# Allegro board interposer_pcie_sma.brd
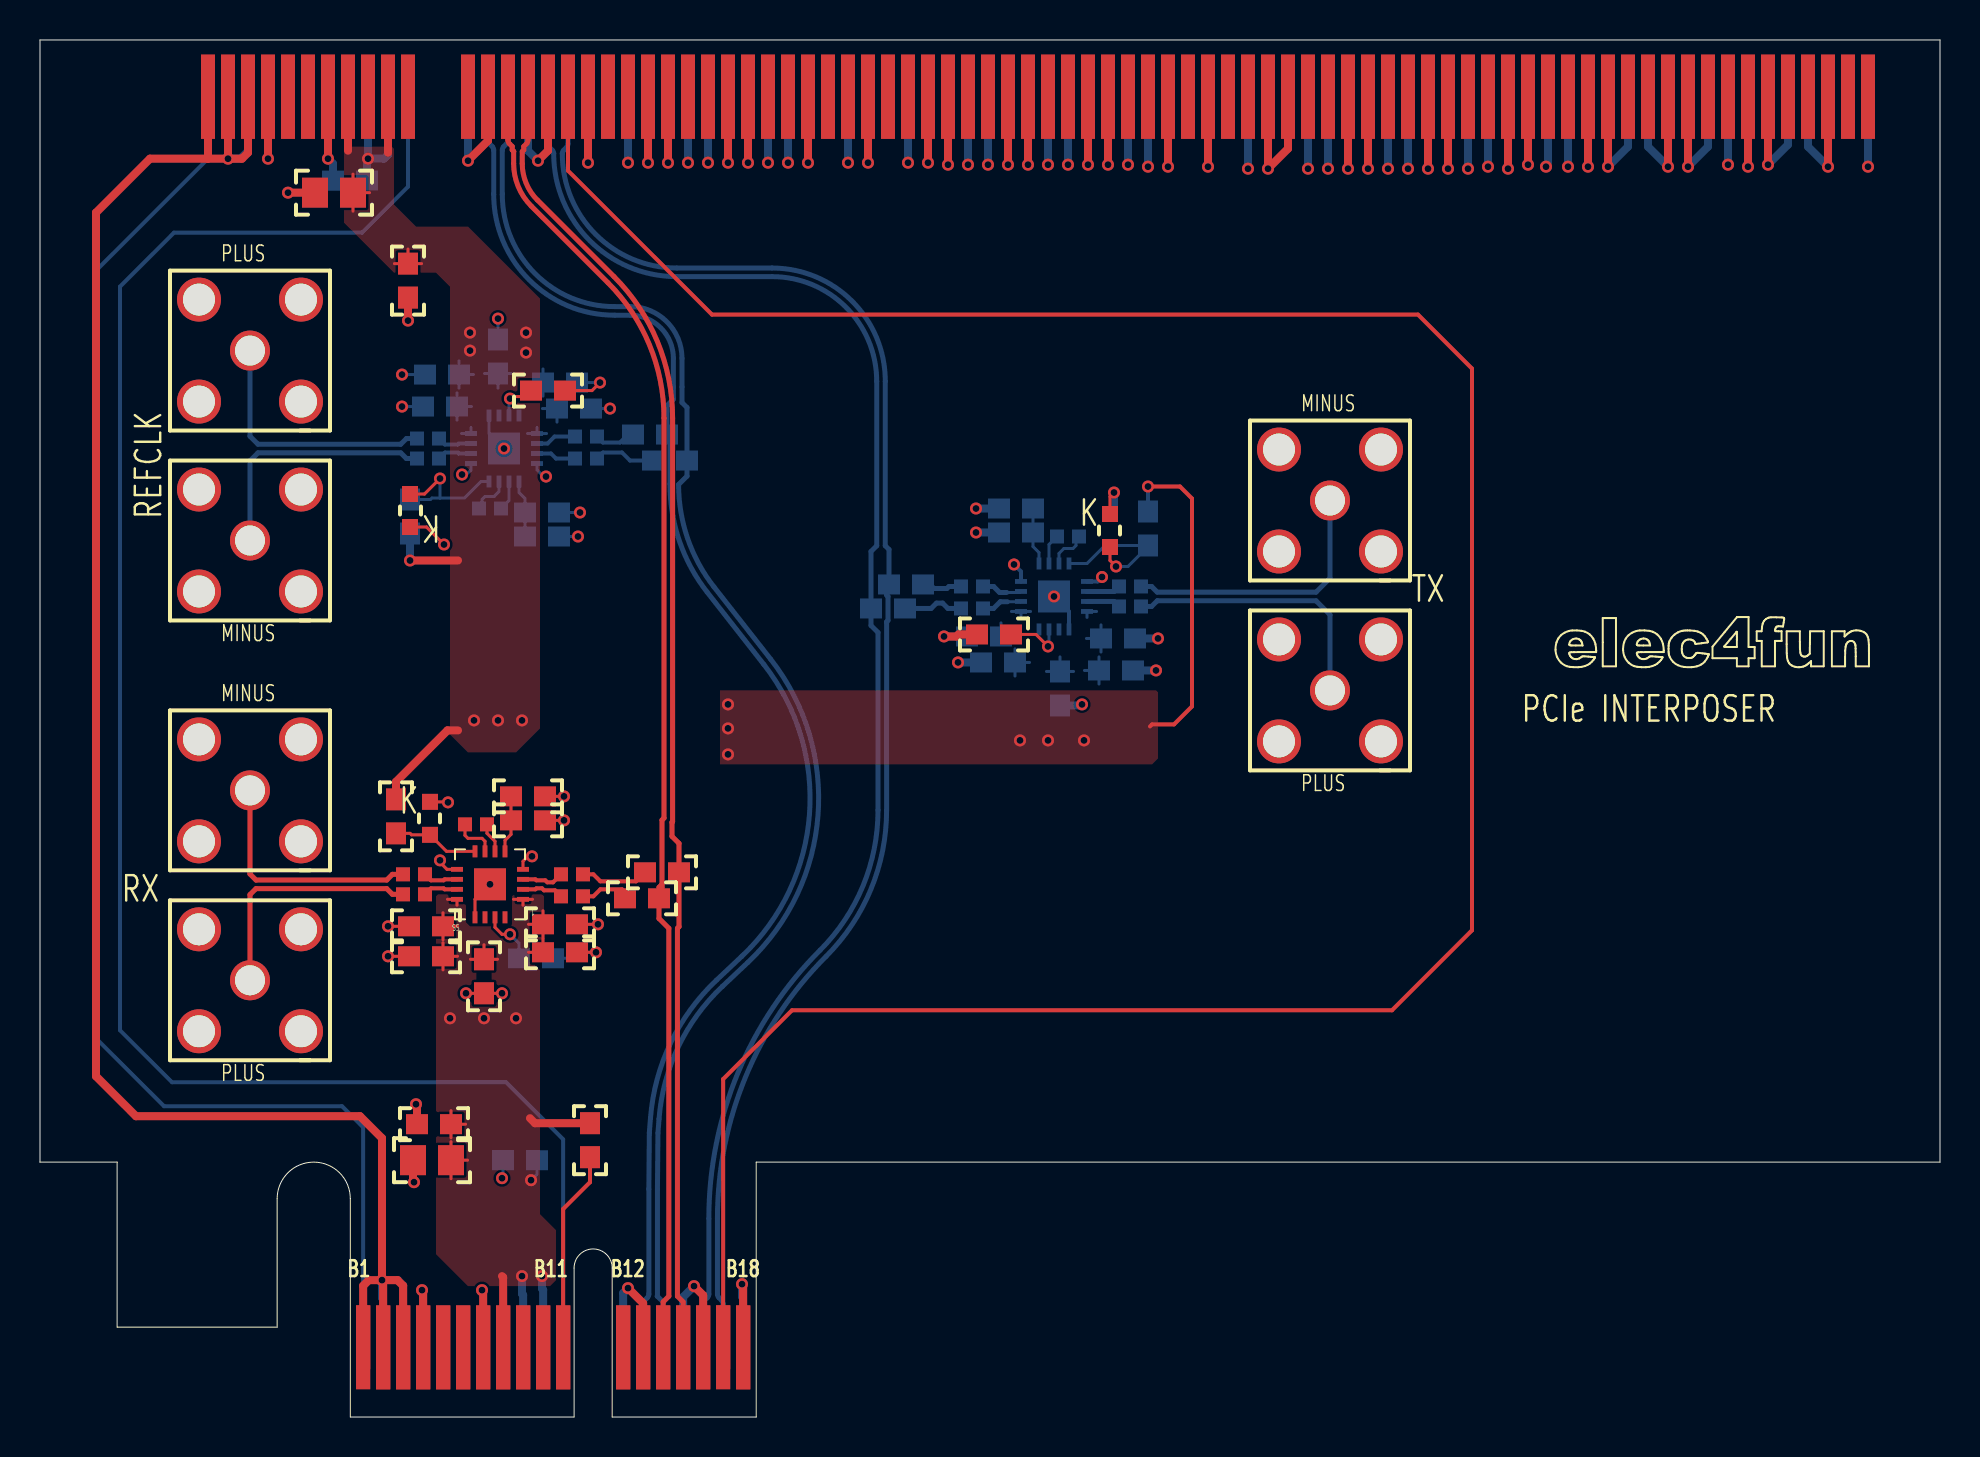
[diagram p0: board, top side]
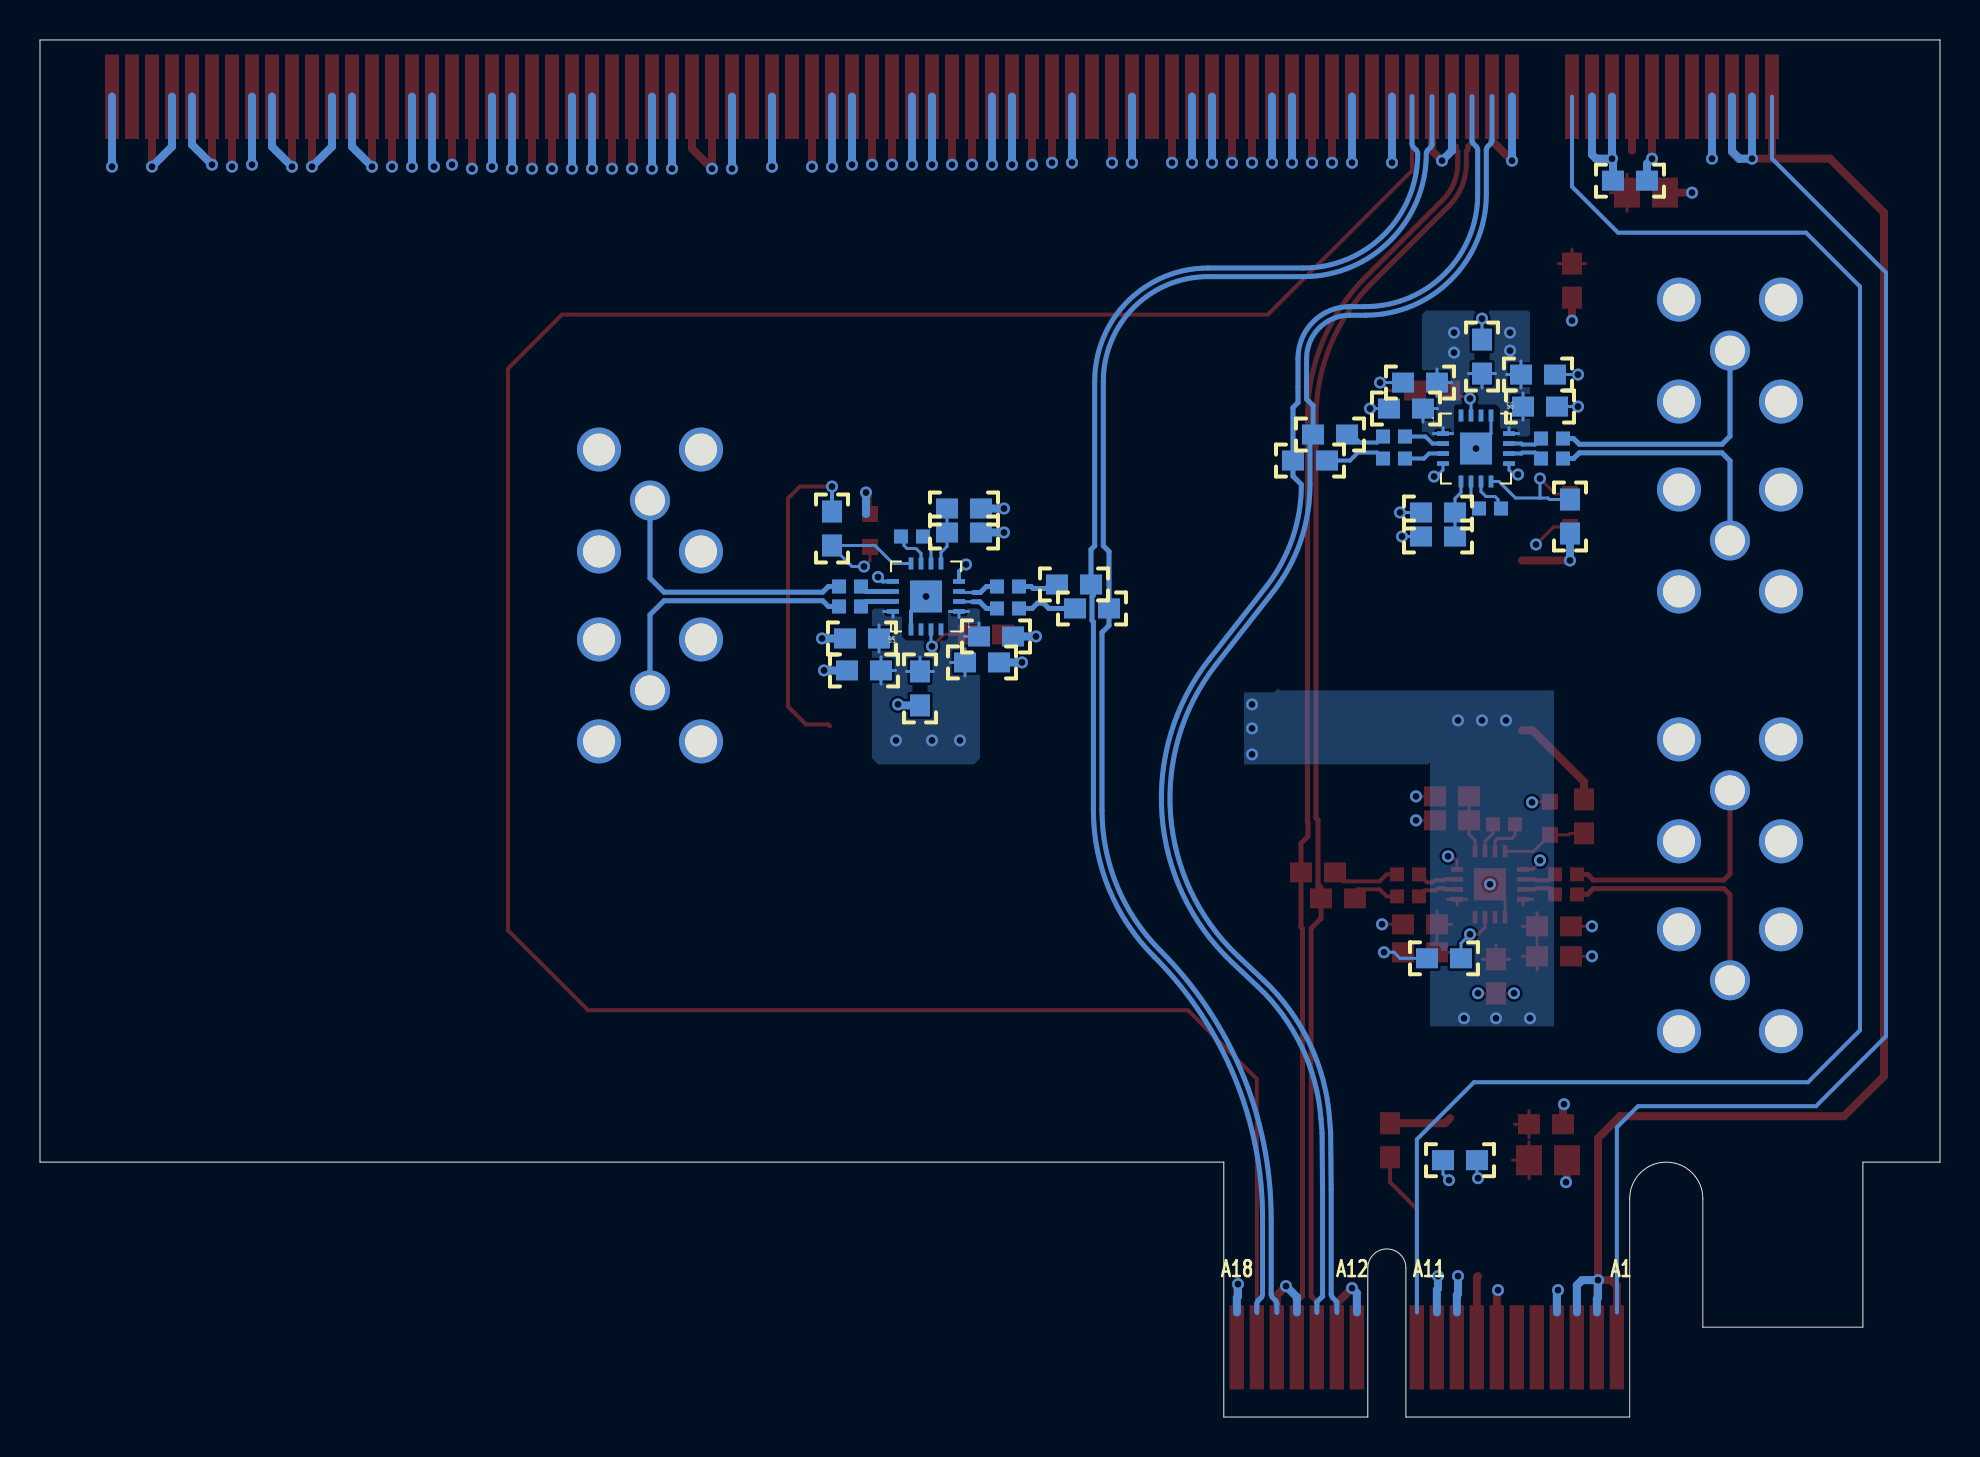
[diagram p1: board, bottom side, seen from below]

Outline 95 x 68.88 mm; copper layers: TOP, GND2, GND3, BOTTOM. Coordinates in mm from the lower left corner of the outline.
Outline path: 0,68.88 0,12.75 3.86,12.75 3.86,4.5 11.86,4.5 11.86,10.92 arc(13.69,12.75) 15.52,10.92 15.52,0 26.7,0 26.7,7.45 arc(27.66,8.41) 28.61,7.45 28.61,0 35.81,0 35.81,12.75 95,12.75 95,68.88 0,68.88

## Design rules (mm)
constraint set DEFAULT: min track width 0.15
net group SMA_REFCLK: nets SMA_REFCLK+ SMA_REFCLK-
net group SMA_RX: nets SMA_RX+ SMA_RX-
net group SMA_TX: nets SMA_TX+ SMA_TX-
net group MATCH_DEV: nets DOWN_TX+ DOWN_TX- IN_REFCLK+ IN_REFCLK- IN_TX+ IN_TX- OUT_REFCLK+ OUT_REFCLK- OUT_TX+ OUT_TX- REFCLK+ REFCLK- UPSTREAM_REFCLK+ UPSTREAM_REFCLK- UPSTREAM_RX+ UPSTREAM_RX- UPSTREAM_TX+ UPSTREAM_TX-

## Placement (name value [footprint] x y rotation side)
C1  10u  [SMT0805_REF]  19.6 12.85 270 top
C2  100n  [SMT0603_REF]  19.7 14.65 270 top
C3  100n  [SMT0603_REF]  24 12.85 90 bottom
C4  10u  [SMT0805_REF]  14.7 61.25 270 top
C5  100n  [SMT0603_REF]  18.4 56.85 0 top
C6  100n  [SMT0603_REF]  15.5 61.85 90 bottom
C54  10n  [SMT0402_REF]  46.6 40.45 0 bottom
C55  100n  [SMT0402_REF]  54.5 40.55 0 bottom
C56  10n  [SMT0402_REF]  46.6 41.55 0 bottom
C57  100n  [SMT0402_REF]  54.5 41.55 0 bottom
C58  10n  [SMT0402_REF]  51.4 44.05 0 bottom
C59  18p  [SMT0603_REF]  48.8 45.45 90 bottom
C60  100n  [SMT0603_REF]  47.9 37.75 90 bottom
C61  1n  [SMT0603_REF]  47.2 39.05 90 bottom
C62  100n  [SMT0603_REF]  53.8 37.35 270 bottom
C63  1n  [SMT0603_REF]  53.9 38.95 270 bottom
C64  10u  [SMT0603_REF]  51 36.45 180 bottom
C65  10n  [SMT0402_REF]  26.6 26.05 180 top
C66  10n  [SMT0402_REF]  26.6 27.15 180 top
C67  100n  [SMT0402_REF]  18.7 26.15 180 top
C68  100n  [SMT0402_REF]  18.7 27.15 180 top
C69  10n  [SMT0402_REF]  21.8 29.65 180 top
C70  18p  [SMT0603_REF]  24.4 31.05 90 top
C71  100n  [SMT0603_REF]  20.1 52.15 90 bottom
C72  1n  [SMT0603_REF]  20 50.55 90 bottom
C73  100n  [SMT0603_REF]  26 51.75 270 bottom
C74  1n  [SMT0603_REF]  26.7 50.45 270 bottom
C75  10u  [SMT0603_REF]  22.2 22.05 0 top
C76  100n  [SMT0402_REF]  19.4 48.95 180 bottom
C77  100n  [SMT0402_REF]  19.4 47.95 180 bottom
C78  18p  [SMT0603_REF]  25.1 44.05 270 bottom
C79  100n  [SMT0603_REF]  19.3 23.05 270 top
C80  1n  [SMT0603_REF]  19.3 24.55 270 top
C81  100n  [SMT0603_REF]  26 23.25 90 top
C82  1n  [SMT0603_REF]  26 24.65 90 top
C83  10n  [SMT0402_REF]  27.3 49.05 180 bottom
C84  10n  [SMT0402_REF]  27.3 47.95 180 bottom
C85  10n  [SMT0402_REF]  22.5 45.45 180 bottom
C86  10u  [SMT0603_REF]  22.9 53.05 0 bottom
D4  GRN_0603  [LED_0603_INV]  53.5 44.35 0 top
D5  GRN_0603  [LED_0603_INV]  19.5 29.95 0 top
D6  GRN_0603  [LED_0603_INV]  18.5 45.35 180 top
J1  PCI_EXP_X16_FEMALE_CONN  [PCIE_CARD_SOCKET_X16]  8.4 66.05 0 top
J2  SMA  [CON_SMA_DROIT_TE]  64.5 36.35 0 top
J3  SMA  [CON_SMA_DROIT_TE]  64.5 45.85 0 top
J4  SMA  [CON_SMA_DROIT_TE]  10.5 21.85 0 top
J5  SMA  [CON_SMA_DROIT_TE]  10.5 31.35 0 top
J6  SMA  [CON_SMA_DROIT_TE]  10.5 53.35 0 top
J7  SMA  [CON_SMA_DROIT_TE]  10.5 43.85 0 top
NOREF  -  []  15.5 -0.15 90 top
NOREF#2  -  []  0 68.88 0 top
NOREF#3  -  []  95 12.75 90 top
NOREF#4  -  []  75.7 37.15 0 top
NOREF#5  -  []  -148.16 -120.4 0 top
P1  PCI_EXP_X1_CARD_EDGE_CONN  [PCIX-1PORT]  -29.49 4.5 0 top
R1  10K  [SMT0603_REF]  27.5 13.85 0 top
R17  680R  [SMT0603_REF]  42.4 40.45 270 bottom
R18  680R  [SMT0603_REF]  43.3 41.65 270 bottom
R19  0R  [SMT0603_REF]  47.7 39.15 270 top
R20  10K  [SMT0603_REF]  55.4 44.45 180 bottom
R21  10K  [SMT0603_REF]  48.8 44.25 90 bottom
R22  680R  [SMT0603_REF]  30.1 25.95 270 top
R23  680R  [SMT0603_REF]  31.1 27.25 270 top
R24  0R  [SMT0603_REF]  24.8 22.95 270 bottom
R25  10K  [SMT0603_REF]  17.8 30.05 0 top
R26  10K  [SMT0603_REF]  24.4 29.85 90 top
R27  10K  [SMT0603_REF]  25.1 45.25 270 bottom
R28  0R  [SMT0603_REF]  25.4 51.35 90 top
R29  10K  [SMT0603_REF]  18.5 45.05 0 bottom
R30  680R  [SMT0603_REF]  30.5 49.15 90 bottom
R31  680R  [SMT0603_REF]  31.5 47.85 90 bottom
U2  ADN2891  [VQFN16_HAND_SOLDER]  50.7 41.05 0 bottom
U4  ADN2891  [VQFN16_HAND_SOLDER]  22.5 26.65 180 top
U6  ADN2891  [VQFN16_HAND_SOLDER]  23.2 48.45 180 bottom

## Library data of the parts
C1 C4 = C10U_10%_10V_0805: Tolerance: T
C2 C3 C5 C6 C60 C62 C71 C73 C79 C81 = C100N_0603
C54 C56 C58 C65 C66 C69 C83-C85 = C10N_0402
C55 C57 C67 C68 C76 C77 = C100N_0402
C59 C70 C78 = C18p_0603
C61 C63 C72 C74 C80 C82 = C1N_0603
C64 C75 C86 = C10U_6V3_0603
D4-D6 = LED_GRN_0603
J1 = PCIEXP_X16_EDGE_MOUNT_CONN
J2-J7 = SMA_VERTICAL
P1 = PCIEXP_X1_CARD_EDGE
R1 R20 R21 R25-R27 R29 = R10K_1%_0603
R17 R18 R22 R23 R30 R31 = R680R_1%_0603
R19 R24 R28 = R0R_5%_0603
U2 U4 U6 = ADN2891

## Footprints (pads in the part's own frame, mm; a bottom-side part is the same pattern mirrored in y, then rotated)
CON_SMA_DROIT_TE
  round 2 hole 1.5: 1(0,0)
  round 2.2 hole 1.6: 2(-2.55,2.55) 3(2.55,2.55) 4(2.55,-2.55) 5(-2.55,-2.55)
LED_0603_INV
  rect 0.8x0.8 smd: 1(0,-0.825) 2(0,0.825)
PCIE_CARD_SOCKET_X16
  rect 0.7x4.2 smd: A1(0,0) A2(1,0) A3(2,0) A4(3,0) A5(4,0) A6(5,0) A7(6,0) A8(7,0) A9(8,0) A10(9,0) A11(10,0) A12(13,0) A13(14,0) A14(15,0) A15(16,0) A16(17,0) A17(18,0) A18(19,0) A19(20,0) A20(21,0) A21(22,0) A22(23,0) A23(24,0) A24(25,0) A25(26,0) A26(27,0) A27(28,0) A28(29,0) A29(30,0) A30(31,0) A31(32,0) A32(33,0) A33(34,0) A34(35,0) A35(36,0) A36(37,0) A37(38,0) A38(39,0) A39(40,0) A40(41,0) A41(42,0) A42(43,0) A43(44,0) A44(45,0) A45(46,0) A46(47,0) A47(48,0) A48(49,0) A49(50,0) A50(51,0) A51(52,0) A52(53,0) A53(54,0) A54(55,0) A55(56,0) A56(57,0) A57(58,0) A58(59,0) A59(60,0) A60(61,0) A61(62,0) A62(63,0) A63(64,0) A64(65,0) A65(66,0) A66(67,0) A67(68,0) A68(69,0) A69(70,0) A70(71,0) A71(72,0) A72(73,0) A73(74,0) A74(75,0) A75(76,0) A76(77,0) A77(78,0) A78(79,0) A79(80,0) A80(81,0) A81(82,0) A82(83,0) B1(0,0) B2(1,0) B3(2,0) B4(3,0) B5(4,0) B6(5,0) B7(6,0) B8(7,0) B9(8,0) B10(9,0) B11(10,0) B12(13,0) B13(14,0) B14(15,0) B15(16,0) B16(17,0) B17(18,0) B18(19,0) B19(20,0) B20(21,0) B21(22,0) B22(23,0) B23(24,0) B24(25,0) B25(26,0) B26(27,0) B27(28,0) B28(29,0) B29(30,0) B30(31,0) B31(32,0) B32(33,0) B33(34,0) B34(35,0) B35(36,0) B36(37,0) B37(38,0) B38(39,0) B39(40,0) B40(41,0) B41(42,0) B42(43,0) B43(44,0) B44(45,0) B45(46,0) B46(47,0) B47(48,0) B48(49,0) B49(50,0) B50(51,0) B51(52,0) B52(53,0) B53(54,0) B54(55,0) B55(56,0) B56(57,0) B57(58,0) B58(59,0) B59(60,0) B60(61,0) B61(62,0) B62(63,0) B63(64,0) B64(65,0) B65(66,0) B66(67,0) B67(68,0) B68(69,0) B69(70,0) B70(71,0) B71(72,0) B72(73,0) B73(74,0) B74(75,0) B75(76,0) B76(77,0) B77(78,0) B78(79,0) B79(80,0) B80(81,0) B81(82,0) B82(83,0)
PCIX-1PORT
  rect 0.711x3.2 smd: A1(45.65,0.74) B17(63.65,0.74)
  rect 0.711x4.191 smd: A2(46.65,0.74) A3(47.65,0.74) A4(48.65,0.74) A5(49.65,0.74) A6(50.65,0.74) A7(51.65,0.74) A8(52.65,0.74) A9(53.65,0.74) A10(54.65,0.74) A11(55.65,0.74) A12(58.65,0.74) A13(59.65,0.74) A14(60.65,0.74) A15(61.65,0.74) A16(62.65,0.74) A17(63.65,0.74) A18(64.65,0.74) B1(45.65,0.74) B2(46.65,0.74) B3(47.65,0.74) B4(48.65,0.74) B5(49.65,0.74) B6(50.65,0.74) B7(51.65,0.74) B8(52.65,0.74) B9(53.65,0.74) B10(54.65,0.74) B11(55.65,0.74) B12(58.65,0.74) B13(59.65,0.74) B14(60.65,0.74) B15(61.65,0.74) B16(62.65,0.74) B18(64.65,0.74)
SMT0402_REF
  rect 0.7x0.7 smd: 1(-0.55,0) 2(0.55,0)
SMT0603_REF
  rect 1x1.1 smd: 1(0,0.85) 2(0,-0.85)
SMT0805_REF
  rect 1.5x1.3 smd: 1(0,0.95) 2(0,-0.95)
VQFN16_HAND_SOLDER
  rect 0.6x0.24 smd: 1(-1.65,0.75) 2(-1.65,0.25) 3(-1.65,-0.25) 4(-1.65,-0.75) 9(1.65,-0.75) 10(1.65,-0.25) 11(1.65,0.25) 12(1.65,0.75)
  rect 0.24x0.6 smd: 5(-0.75,-1.65) 6(-0.25,-1.65) 7(0.25,-1.65) 8(0.75,-1.65) 13(0.75,1.65) 14(0.25,1.65) 15(-0.25,1.65) 16(-0.75,1.65)
  rect 1.6x1.6 smd: 17(0,0)

## Nets
+3.3V: C1.1 C2.1 C3.1 C4.1 C5.1 C6.1 C60.1 C61.1 C62.1 C63.1 C64.1 C71.1 C72.1 C73.1 C74.1 C75.1 C79.1 C80.1 C81.1 C82.1 C86.1 J1.A9 J1.A10 J1.B8 J1.B10 P1.A9 P1.A10 P1.B8 R1.1 R20.1 R25.1 R29.1 U2.1 U2.12 U4.1 U4.12 U6.1 U6.12
+12V: J1.A2 J1.A3 J1.B1 J1.B2 J1.B3 P1.A2 P1.A3 P1.B1 P1.B2 P1.B3
GND: C1.2 C2.2 C3.2 C4.2 C5.2 C6.2 C59.2 C60.2 C61.2 C62.2 C63.2 C64.2 C70.2 C71.2 C72.2 C73.2 C74.2 C75.2 C78.2 C79.2 C80.2 C81.2 C82.2 C86.2 D4.2(K) D5.2(K) D6.2(K) J1.A4 J1.A12 J1.A15 J1.A18 J1.A20 J1.A23 J1.A24 J1.A27 J1.A28 J1.A31 J1.A34 J1.A37 J1.A38 J1.A41 J1.A42 J1.A45 J1.A46 J1.A49 J1.A51 J1.A54 J1.A55 J1.A58 J1.A59 J1.A62 J1.A63 J1.A66 J1.A67 J1.A70 J1.A71 J1.A74 J1.A75 J1.A78 J1.A79 J1.A82 J1.B4 J1.B7 J1.B13 J1.B16 J1.B18 J1.B21 J1.B22 J1.B25 J1.B26 J1.B29 J1.B32 J1.B35 J1.B36 J1.B39 J1.B40 J1.B43 J1.B44 J1.B47 J1.B49 J1.B52 J1.B53 J1.B56 J1.B57 J1.B60 J1.B61 J1.B64 J1.B65 J1.B68 J1.B69 J1.B72 J1.B73 J1.B76 J1.B77 J1.B80 J2.2 J2.3 J2.4 J2.5 J3.2 J3.3 J3.4 J3.5 J4.2 J4.3 J4.4 J4.5 J5.2 J5.3 J5.4 J5.5 J6.2 J6.3 J6.4 J6.5 J7.2 J7.3 J7.4 J7.5 P1.A4 P1.A12 P1.A15 P1.A18 P1.B4 P1.B7 P1.B13 P1.B16 P1.B18 R19.2 R21.2 R24.2 R26.2 R27.2 R28.2 U2.4 U2.9 U2.13 U2.17 U4.4 U4.9 U4.13 U4.17 U6.4 U6.9 U6.13 U6.17
DOWN_RX+: C65.1 R22.2
DOWN_RX-: C66.1 R23.2
DOWN_TX+: C54.1 R17.2
DOWN_TX-: C56.1 R18.2
IN_REFCLK+: C83.2 U6.2
IN_REFCLK-: C84.2 U6.3
IN_RX+: C65.2 U4.2
IN_RX-: C66.2 U4.3
IN_TX+: C54.2 U2.2
IN_TX-: C56.2 U2.3
OUT_REFCLK+: C76.1 U6.11
OUT_REFCLK-: C77.1 U6.10
OUT_RX+: C67.1 U4.11
OUT_RX-: C68.1 U4.10
OUT_TX+: C55.1 U2.11
OUT_TX-: C57.1 U2.10
PRSNT1: J1.A1 P1.A1
PRSNT2: J1.B17 P1.B17
REFCLK+: C83.1 R30.2
REFCLK-: C84.1 R31.2
SMA_REFCLK+: C76.2 J6.1(SIGNAL)
SMA_REFCLK-: C77.2 J7.1(SIGNAL)
SMA_RX+: C67.2 J4.1(SIGNAL)
SMA_RX-: C68.2 J5.1(SIGNAL)
SMA_TX+: C55.2 J2.1(SIGNAL)
SMA_TX-: C57.2 J3.1(SIGNAL)
UPSTREAM_PERST#: J1.A11 P1.A11
UPSTREAM_REFCLK+: J1.A13 P1.A13 R30.1
UPSTREAM_REFCLK-: J1.A14 P1.A14 R31.1
UPSTREAM_RX+: J1.A16 P1.A16 R17.1
UPSTREAM_RX-: J1.A17 P1.A17 R18.1
UPSTREAM_TX+: J1.B14 P1.B14 R22.1
UPSTREAM_TX-: J1.B15 P1.B15 R23.1
N7272816: R19.1 U2.15
N7273068: D4.1 R20.2 U2.8
N7273578: C58.2 U2.7
N7273582: C58.1 U2.6
N7274684: C59.1 R21.1 U2.5(THRADJ)
N7275493: D5.1 R25.2 U4.8
N7275497: C70.1 R26.1 U4.5(THRADJ)
N7275851: R24.1 U4.15
N7276115: C69.1 U4.6
N7276119: C69.2 U4.7
N7302225: P1.B11(WAKE#) R1.2
N7364343: C78.1 R27.1 U6.5(THRADJ)
N7364351: D6.1 R29.2 U6.8
N7364721: R28.1 U6.15
N7364949: C85.1 U6.6
N7364957: C85.2 U6.7

Pads without a net: J1 A5 A6 A7 A8 A19 A21 A22 A25 A26 A29 A30 A32 A33 A35 A36 A39 A40 A43 A44 A47 A48 A50 A52 A53 A56 A57 A60 A61 A64 A65 A68 A69 A72 A73 A76 A77 A80 A81 B5 B6 B9 B11 B12 B19 B20 B23 B24 B27 B28 B30 B31 B33 B34 B37 B38 B41 B42 B45 B46 B48 B50 B51 B54 B55 B58 B59 B62 B63 B66 B67 B70 B71 B74 B75 B78 B79 B81 B82; P1 A5 A6 A7 A8 B5 B6 B9 B10 B12; U2 14 16; U4 14 16; U6 14 16

## Via types
v1: diameter 0.6, hole 0.35, TOP to BOTTOM, 130 vias

## Routing (per net, layer and track width the routed paths; a pad name or vN(x,y) marks a point on that pad's centre or on a via; arc(x,y) is an arc through that point)
+3.3V: length 93.7
  TOP w0.15: C82.1 25.15,25.33 ; C82.1 25.15,23.97 ; C82.1 24.42,24.65 ; 25.15,23.93 C81.1 24.42,23.25 ; C2.1 21.28,14.65 ; C2.1 20.55,13.97 ; C2.1 20.55,15.33 ; C79.1 20.88,23.05 ; C79.1 20.15,23.73 ; C79.1 20.15,22.37 ; C75.1 22.88,22.9 ; C75.1 21.52,22.9 ; C75.1 22.2,23.63 ; 20.15,23.87 C80.1 ; C80.1 20.88,24.55 ; C80.1 20.15,25.23 ; 20.85,25.6 U4.12 20.37,25.9 ; C4.1 16.48,61.25 ; C4.1 15.65,62.18 ; C4.1 15.65,60.32 ; C1.1 20.55,13.78 ; C1.1 20.55,11.92 ; C1.1 21.38,12.85 ; 17.72,57.7 C5.1 ; C5.1 18.4,58.43 ; C5.1 19.08,57.7 ; U4.1 24.63,25.9 ; U4.1 24.15,25.6 ; U4.1 23.67,25.9
  TOP w0.2: 55.5,34.55 55.6,34.65 56.7,34.65 57.6,35.55 57.6,45.95 57,46.55 v1(55.4,46.55)
  TOP w0.4: P1.B8 23.16,6.99 23.1,7.05 ; v1(18.5,42.85) 20.9,42.85 ; J1.A10 17.4,63.25 ; R25.1 17.8,31.77 20.37,34.35 20.9,34.35 ; J1.B8 15.4,63.35 ; 24.5,14.95 24.75,14.7 R1.1
  BOTTOM w0.15: U6.1 24.85,49.5 ; U6.1 24.37,49.2 ; U6.1 25.33,49.2 ; 21.07,49.2 U6.12 21.55,49.5 ; 52.22,37.35 C62.1 ; C62.1 52.95,38.03 ; C62.1 52.95,36.67 ; C64.1 51.68,37.3 ; C64.1 50.32,37.3 ; C64.1 51,38.03 ; 48.57,40.3 U2.1 ; U2.1 49.53,40.3 ; U2.1 49.05,40 ; 48.05,39.73 C61.1 48.78,39.05 ; 52.35,40 U2.12 52.83,40.3 ; C71.1 20.95,52.83 ; C71.1 20.95,51.47 ; C71.1 21.68,52.15 ; 24.42,51.75 C73.1 ; C73.1 25.15,51.07 ; C73.1 25.15,52.43 ; 25.12,50.45 C74.1 25.85,49.77 ; 53.05,38.27 C63.1 ; C63.1 53.05,39.63 ; C63.1 52.32,38.95 ; 48.75,37.07 C60.1 ; C60.1 49.48,37.75 ; C60.1 48.75,38.43 ; C86.1 23.58,52.2 ; C86.1 22.22,52.2 ; C86.1 22.9,51.47 ; C3.1 24.85,12.15 v1(24.55,11.85) ; C72.1 21.58,50.55 ; C72.1 20.85,51.23 ; C72.1 20.85,49.87
  BOTTOM w0.2: R20.1 v1(55.4,46.55)
  BOTTOM w0.4: P1.A9 24.16,6.1 24.1,6.16 v1(24.1,7.05) ; C6.1 16.35,62.9 v1(16.4,62.95) ; J1.A9 v1(16.4,62.95) ; v1(16.4,62.95) 17.2,62.95 17.4,63.15 J1.A10 ; v1(25.1,7.05) 25.1,6.42 25.16,6.36 P1.A10 ; R29.1 v1(18.5,42.85)
  vias: v1(20.5,19.95) v1(21.5,54.25) v1(21.5,53.35) v1(21.7,34.85) v1(22.2,19.95) v1(22.9,34.85) v1(23.8,19.95) v1(24.1,34.85) v1(24.3,54.25) v1(24.3,53.25) v1(34.4,35.65) v1(34.4,34.45) v1(34.4,33.15) v1(49,33.85) v1(50.4,33.85) v1(52.2,33.85)
+12V: length 101.4
  TOP w0.4: v1(17.1,6.85) 17.87,6.85 18.16,6.56 P1.A3 ; v1(17.1,6.85) 17.1,13.95 16,15.05 4.8,15.05 2.8,17.05 2.8,60.25 5.5,62.95 8.4,62.95 ; v1(17.1,6.85) 17.16,6.79 P1.A2 ; v1(17.1,6.85) 16.44,6.85 16.16,6.56 P1.B1 ; 8.4,62.95 J1.B1 ; 8.4,62.95 v1(9.4,62.95) ; J1.A2 v1(9.4,62.95) ; v1(9.4,62.95) 10.1,62.95 10.4,63.25 J1.A3
  BOTTOM w0.4: P1.A3 18.16,6.59 17.9,6.85 v1(17.1,6.85) 17.1,5.96 17.16,5.91 P1.A2 ; J1.A3 10.4,63.32 10.03,62.95 v1(9.4,62.95) J1.A2
GND: length 545.7
  TOP w0.15: C82.2 v1(27.9,24.65) ; v1(23.1,21.2) C75.2 v1(21.3,21.2) ; D4.2 53.5,46.05 v1(53.7,46.25) ; D5.2 20.38,30.77 v1(20.4,30.75) ; v1(22.5,26.65) 21.75,25.9 U4.13 ; R26.2 v1(26.2,29.85) ; v1(28,51.75) 27.6,51.35 R28.2 ; v1(24.6,28.05) 24.4,28.05 24.15,27.8 U4.4 ; C81.2 v1(27.8,23.25) ; U4.9 20.35,27.4 20.1,27.65 20.1,27.75 v1(20,27.85) ; v1(20.2,43.65) 19.33,44.52 D6.2 ; C70.2 v1(26.2,31.05) ; C79.2 v1(17.4,23.05) ; C80.2 v1(17.4,24.55)
  TOP w0.4: v1(22.1,6.35) 22.16,6.29 P1.B7 ; J1.B77 v1(86.4,62.65) ; J1.B22 v1(31.4,62.75) ; J1.A18 v1(27.4,62.75) ; v1(29.4,6.45) 30.16,5.69 P1.B13 ; C4.2 v1(12.4,61.25) ; J1.B61 v1(70.4,62.45) ; J1.B65 v1(74.4,62.65) ; C2.2 18.85,15.6 v1(18.8,15.65) ; J1.B68 v1(77.4,62.55) ; J1.B47 v1(56.4,62.55) ; v1(45.2,39.05) 45.83,39.05 45.93,39.15 R19.2 ; J1.B53 62.4,63.45 v1(61.4,62.45) J1.B52 ; v1(24.9,62.85) 25.4,63.35 J1.B16 ; v1(18.7,11.75) 18.65,11.8 C1.2 ; J1.B69 v1(78.4,62.55) ; J1.B29 v1(38.4,62.75) ; J1.B80 v1(89.4,62.55) ; P1.A18 35.16,6.59 v1(35.1,6.65) ; J1.B36 v1(45.4,62.65) ; J1.B40 v1(49.4,62.65) ; J1.B25 v1(34.4,62.75) ; J1.B7 v1(14.4,62.95) ; J1.B43 v1(52.4,62.65) ; J1.B60 v1(69.4,62.45) ; J1.B72 v1(81.4,62.55) ; v1(19.1,6.35) 19.16,6.29 P1.A4 ; J1.A49 v1(58.4,62.55) ; v1(21.4,62.85) 22.4,63.85 J1.B13 ; J1.B64 v1(73.4,62.45) ; J1.B39 v1(48.4,62.65) ; C5.2 v1(18.4,54.85) ; J1.B56 v1(65.4,62.45) ; J1.B73 v1(82.4,62.55) ; v1(32.7,6.55) 33.16,6.09 P1.B16 ; J1.B35 v1(44.4,62.75) ; J1.B26 v1(35.4,62.75) ; J1.B57 v1(66.4,62.45) ; J1.B21 v1(30.4,62.75) ; J1.B44 v1(53.4,62.65) ; J1.A4 v1(11.4,62.95) ; J1.B32 v1(41.4,62.75) ; J1.B76 v1(85.4,62.55)
  GND2 w0.15: J7.3 14.33,46.4 ; J7.3 13.05,47.68 ; J7.3 13.05,45.12 ; J7.3 11.77,46.4 ; 60.67,33.8 J2.5 ; J2.5 63.23,33.8 ; J2.5 61.95,35.08 ; J2.5 61.95,32.52 ; J6.3 13.05,57.18 ; J6.3 13.05,54.62 ; J6.3 14.33,55.9 ; J6.3 11.77,55.9 ; J2.2 63.23,38.9 ; J2.2 61.95,37.62 ; J2.2 61.95,40.18 ; J2.2 60.67,38.9 ; J7.4 13.05,42.58 ; J7.4 13.05,40.02 ; J7.4 14.33,41.3 ; J7.4 11.77,41.3 ; J6.2 9.23,55.9 ; J6.2 6.67,55.9 ; J6.2 7.95,54.62 ; J6.2 7.95,57.18 ; J2.4 67.05,35.08 ; J2.4 65.77,33.8 ; J2.4 68.33,33.8 ; J2.4 67.05,32.52 ; J4.2 9.23,24.4 ; J4.2 7.95,23.12 ; J4.2 6.67,24.4 ; J4.2 7.95,25.68 ; J3.4 67.05,44.58 ; J3.4 67.05,42.02 ; J3.4 65.77,43.3 ; J3.4 68.33,43.3 ; 6.67,50.8 J6.5 ; J6.5 7.95,52.08 ; J6.5 7.95,49.52 ; J6.5 9.23,50.8 ; 6.67,33.9 J5.2 ; J5.2 7.95,35.18 ; J5.2 7.95,32.62 ; J5.2 9.23,33.9 ; J5.4 14.33,28.8 ; J5.4 13.05,30.08 ; J5.4 13.05,27.52 ; J5.4 11.77,28.8 ; J3.2 63.23,48.4 ; J3.2 61.95,49.68 ; J3.2 60.67,48.4 ; J3.2 61.95,47.12 ; J4.5 7.95,20.58 ; J4.5 7.95,18.02 ; J4.5 9.23,19.3 ; J4.5 6.67,19.3 ; J6.4 14.33,50.8 ; J6.4 11.77,50.8 ; J6.4 13.05,49.52 ; J6.4 13.05,52.08 ; J7.5 9.23,41.3 ; J7.5 6.67,41.3 ; J7.5 7.95,40.02 ; J7.5 7.95,42.58 ; J5.3 13.05,35.18 ; J5.3 13.05,32.62 ; J5.3 14.33,33.9 ; J5.3 11.77,33.9 ; 6.67,46.4 J7.2 ; J7.2 9.23,46.4 ; J7.2 7.95,45.12 ; J7.2 7.95,47.68 ; 67.05,47.12 J3.3 ; J3.3 65.77,48.4 ; J3.3 68.33,48.4 ; J3.3 67.05,49.68 ; J3.5 61.95,44.58 ; J3.5 61.95,42.02 ; J3.5 63.23,43.3 ; J3.5 60.67,43.3 ; J5.5 7.95,30.08 ; J5.5 7.95,27.52 ; J5.5 6.67,28.8 ; J5.5 9.23,28.8 ; J2.3 68.33,38.9 ; J2.3 67.05,40.18 ; J2.3 67.05,37.62 ; J2.3 65.77,38.9 ; J4.3 13.05,25.68 ; J4.3 11.77,24.4 ; J4.3 14.33,24.4 ; J4.3 13.05,23.12 ; J4.4 13.05,20.58 ; J4.4 14.33,19.3 ; J4.4 13.05,18.02 ; J4.4 11.77,19.3
  GND3 w0.15: J4.4 13.05,20.58 ; J4.4 14.33,19.3 ; J4.4 11.77,19.3 ; J4.4 13.05,18.02 ; J7.3 13.05,47.68 ; J7.3 14.33,46.4 ; J7.3 13.05,45.12 ; J7.3 11.77,46.4 ; J6.3 13.05,57.18 ; J6.3 11.77,55.9 ; J6.3 14.33,55.9 ; J6.3 13.05,54.62 ; 11.77,33.9 J5.3 ; J5.3 13.05,32.62 ; J5.3 14.33,33.9 ; J5.3 13.05,35.18 ; J4.2 7.95,25.68 ; J4.2 9.23,24.4 ; J4.2 6.67,24.4 ; J4.2 7.95,23.12 ; J3.2 63.23,48.4 ; J3.2 60.67,48.4 ; J3.2 61.95,47.12 ; J3.2 61.95,49.68 ; 61.95,37.62 J2.2 ; J2.2 61.95,40.18 ; J2.2 60.67,38.9 ; J2.2 63.23,38.9 ; J6.2 7.95,57.18 ; J6.2 9.23,55.9 ; J6.2 6.67,55.9 ; J6.2 7.95,54.62 ; J2.4 68.33,33.8 ; J2.4 67.05,35.08 ; J2.4 65.77,33.8 ; J2.4 67.05,32.52 ; 7.95,49.52 J6.5 ; J6.5 7.95,52.08 ; J6.5 9.23,50.8 ; J6.5 6.67,50.8 ; 7.95,18.02 J4.5 ; J4.5 9.23,19.3 ; J4.5 7.95,20.58 ; J4.5 6.67,19.3 ; 67.05,47.12 J3.3 ; J3.3 67.05,49.68 ; J3.3 65.77,48.4 ; J3.3 68.33,48.4 ; J5.2 7.95,35.18 ; J5.2 7.95,32.62 ; J5.2 9.23,33.9 ; J5.2 6.67,33.9 ; 7.95,40.02 J7.5 ; J7.5 6.67,41.3 ; J7.5 9.23,41.3 ; J7.5 7.95,42.58 ; 6.67,46.4 J7.2 ; J7.2 7.95,47.68 ; J7.2 9.23,46.4 ; J7.2 7.95,45.12 ; J6.4 14.33,50.8 ; J6.4 13.05,49.52 ; J6.4 11.77,50.8 ; J6.4 13.05,52.08 ; J3.4 68.33,43.3 ; J3.4 67.05,44.58 ; J3.4 67.05,42.02 ; J3.4 65.77,43.3 ; 65.77,38.9 J2.3 ; J2.3 67.05,37.62 ; J2.3 68.33,38.9 ; J2.3 67.05,40.18 ; 11.77,41.3 J7.4 ; J7.4 14.33,41.3 ; J7.4 13.05,42.58 ; J7.4 13.05,40.02 ; J3.5 61.95,44.58 ; J3.5 63.23,43.3 ; J3.5 61.95,42.02 ; J3.5 60.67,43.3 ; 13.05,27.52 J5.4 ; J5.4 14.33,28.8 ; J5.4 13.05,30.08 ; J5.4 11.77,28.8 ; 6.67,28.8 J5.5 ; J5.5 7.95,27.52 ; J5.5 7.95,30.08 ; J5.5 9.23,28.8 ; 61.95,32.52 J2.5 ; J2.5 61.95,35.08 ; J2.5 60.67,33.8 ; J2.5 63.23,33.8 ; 13.05,23.12 J4.3 ; J4.3 13.05,25.68 ; J4.3 14.33,24.4 ; J4.3 11.77,24.4
  BOTTOM w0.15: C86.2 v1(22.9,54.95) ; C74.2 v1(28.5,50.45) ; C72.2 v1(18.1,50.55) ; C71.2 v1(18.1,52.15) ; R27.2 v1(27,45.25) ; U6.4 24.85,47.38 25.18,47.05 v1(25.3,47.05) ; C3.2 23.15,12 v1(23.1,11.95) ; U6.9 21.55,47.38 21.32,47.15 v1(21.1,47.15) ; C73.2 v1(28,51.75) ; v1(27.8,23.25) 27.3,23.25 27,22.95 R24.2 ; C78.2 v1(26.9,44.05) ; v1(23.2,48.45) 22.45,49.2 U6.13
  BOTTOM w0.2: v1(48.7,42.65) 49.05,42.3 U2.4 ; v1(50.7,41.05) 51.45,40.3 U2.13 ; v1(53.1,42.02) 52.88,41.8 U2.9
  BOTTOM w0.4: v1(82.4,62.55) 83.4,63.55 J1.A74 ; C60.2 v1(45.9,37.75) ; v1(75.3,62.55) 75.4,62.65 J1.A66 ; J1.A70 79.4,63.55 v1(78.4,62.55) ; J1.A49 v1(58.4,62.55) ; J1.A15 24.4,63.35 v1(24.9,62.85) ; v1(32.7,6.55) 32.16,6 P1.A15 ; J1.A37 v1(46.4,62.65) ; J1.A46 v1(55.4,62.55) ; C61.2 v1(45.2,39.05) ; J1.A4 v1(11.4,62.95) ; J1.A78 87.4,63.65 v1(86.4,62.65) ; J1.A27 v1(36.4,62.75) ; v1(29.4,6.45) 29.16,6.2 P1.A12 ; J1.A63 v1(72.4,62.55) ; J1.A42 v1(51.4,62.65) ; J1.A51 v1(60.4,62.45) ; J1.A55 v1(64.4,62.45) ; v1(19.1,6.35) 19.16,6.29 P1.A4 ; J1.A82 v1(91.4,62.55) ; J1.A28 v1(37.4,62.75) ; C62.2 v1(55.8,37.35) ; C6.2 14.65,62.7 v1(14.4,62.95) ; J1.A71 80.4,63.55 v1(81.4,62.55) ; J1.A75 v1(84.4,62.65) ; J1.A45 v1(54.4,62.65) ; v1(89.4,62.55) 88.4,63.55 J1.A79 ; J1.A38 v1(47.4,62.65) ; J1.A67 v1(76.4,62.55) ; 53.7,45.17 v1(53.7,46.25) ; J1.A18 v1(27.4,62.75) ; J1.A34 v1(43.4,62.75) ; R21.2 v1(46.8,44.25) ; C63.2 v1(55.9,38.95) ; J1.A31 v1(40.4,62.75) ; J1.A58 v1(67.4,62.45) ; P1.A18 35.16,5.96 35.1,6.02 v1(35.1,6.65) ; J1.A41 v1(50.4,62.65) ; C59.2 v1(46.8,45.45) ; v1(52.1,35.65) 52.05,35.6 C64.2 ; J1.A54 v1(63.4,62.45) ; J1.A24 v1(33.4,62.75) ; J1.A12 v1(21.4,62.85) ; J1.A62 v1(71.4,62.45) ; J1.A20 v1(29.4,62.75) ; J1.A59 v1(68.4,62.45) ; J1.A23 v1(32.4,62.75)
DOWN_RX+: length 2.6
  TOP w0.2: R22.2 29.25,26.25 29.1,26.4 28.02,26.4 27.67,26.05 C65.1
DOWN_RX-: length 3.4
  TOP w0.2: C66.1 27.67,27.15 28.02,26.8 29.8,26.8 R23.2
DOWN_TX+: length 3
  BOTTOM w0.25: R17.2 44.56,40.45 44.82,40.71 45.13,40.71 45.4,40.45 C54.1
DOWN_TX-: length 2
  BOTTOM w0.25: C56.1 45.45,41.55 45.35,41.45 44.7,41.45 44.5,41.65 R18.2
IN_REFCLK+: length 2
  BOTTOM w0.2: U6.2 25.38,48.7 25.73,49.05 C83.2
IN_REFCLK-: length 2
  BOTTOM w0.2: C84.2 25.8,47.95 25.55,48.2 U6.3
IN_RX+: length 2.1
  TOP w0.2: C65.2 25.75,26.35 25.2,26.35 25.1,26.45 24.82,26.45 24.77,26.4 U4.2
IN_RX-: length 2.1
  TOP w0.2: C66.2 25.65,26.75 25.37,26.75 25.27,26.85 24.82,26.85 24.77,26.9 U4.3
IN_TX+: length 2
  BOTTOM w0.15: 48.37,40.78 49.03,40.78 U2.2
  BOTTOM w0.25: C54.2 47.68,40.45 48.01,40.78 48.37,40.78
IN_TX-: length 2
  BOTTOM w0.15: 48.33,41.25 49,41.25 U2.3
  BOTTOM w0.25: 48.33,41.25 47.98,41.25 47.68,41.55 C56.2
OUT_REFCLK+: length 1.7
  BOTTOM w0.2: U6.11 20.93,48.7 20.88,48.65 20.25,48.65 C76.1
OUT_REFCLK-: length 1.7
  BOTTOM w0.2: C77.1 20.25,48.25 20.88,48.25 20.93,48.2 U6.10
OUT_RX+: length 1.7
  TOP w0.2: C67.1 19.55,26.45 20.18,26.45 20.23,26.4 U4.11
OUT_RX-: length 1.7
  TOP w0.2: C68.1 19.55,26.85 20.18,26.85 20.23,26.9 U4.10
OUT_TX+: length 1.7
  BOTTOM w0.25: U2.11 53.7,40.8 C55.1
OUT_TX-: length 1.7
  BOTTOM w0.25: U2.10 53.7,41.3 C57.1
PRSNT1: length 74
  BOTTOM w0.2: J1.A1 8.4,62.95 2.7,57.25 2.7,19.05 6.2,15.55 15.1,15.55 16.16,14.49 P1.A1
PRSNT2: length 133.3
  TOP w0.2: J1.B17 26.4,62.35 33.6,55.15 68.9,55.15 71.6,52.45 71.6,24.35 67.6,20.35 37.6,20.35 34.16,16.9 P1.B17
REFCLK+: length 2.1
  BOTTOM w0.2: R30.2 29.4,49.15 29,48.75 28.15,48.75 C83.1
REFCLK-: length 3.1
  BOTTOM w0.2: C84.1 28.15,48.25 29.1,48.25 29.5,47.85 R31.2
SMA_REFCLK+: length 12.9
  BOTTOM w0.25: C76.2 18.32,48.95 18.04,48.66 10.9,48.66 10.5,49.06 J6.1
SMA_REFCLK-: length 12.6
  BOTTOM w0.25: J7.1 10.5,47.83 10.9,48.23 18.04,48.23 18.32,47.95 C77.2
SMA_RX+: length 12.2
  TOP w0.25: J4.1 10.5,26.13 10.8,26.43 17.34,26.43 17.62,26.15 C67.2
SMA_RX-: length 12.1
  TOP w0.25: C68.2 17.62,27.15 17.34,26.86 10.8,26.86 10.5,27.16 J5.1
SMA_TX+: length 13.8
  BOTTOM w0.25: C55.2 55.58,40.55 55.86,40.83 63.8,40.83 64.5,40.13 J2.1 64.5,36.15
SMA_TX-: length 13.7
  BOTTOM w0.25: J3.1 64.5,41.96 63.8,41.26 55.86,41.26 55.58,41.55 C57.2
UPSTREAM_PERST#: length 91.2
  BOTTOM w0.2: J1.A11 18.4,61.55 16.1,59.25 6.7,59.25 4,56.55 4,19.35 6.6,16.75 23.3,16.75 26.16,13.89 P1.A11
UPSTREAM_REFCLK+: length 71
  BOTTOM w0.25: J1.A13 22.4,63.87 arc(22.42,63.78) 22.47,63.7 22.61,63.56 arc(22.67,63.48) 22.69,63.38 22.69,61.16 arc(24.46,56.89) 28.73,55.12 29.51,55.12 arc(31.04,54.48) 31.67,52.96 31.67,51.53 31.67,50.92 31.35,50.6 R30.1 31.5,49 31.5,46.68 arc(31.97,43.81) 33.36,41.26 36.19,37.65 arc(38.47,30.13) 35.09,23.05 33.82,21.85 arc(31.53,18.71) 30.52,14.95 30.47,14.22 30.44,11.39 30.44,6.15 arc(30.42,6.05) 30.37,5.97 30.16,5.76 P1.A13
UPSTREAM_REFCLK-: length 71.1
  BOTTOM w0.25: J1.A14 23.4,63.87 arc(23.38,63.78) 23.33,63.7 23.19,63.56 arc(23.13,63.48) 23.12,63.38 23.12,61.16 arc(24.76,57.19) 28.73,55.55 29.51,55.55 arc(31.34,54.79) 32.1,52.96 32.1,51.53 32.1,50.75 32.35,50.5 R31.1 32.35,47.07 31.93,46.65 arc(32.38,43.94) 33.7,41.53 36.53,37.91 arc(38.9,30.1) 35.39,22.73 34.12,21.54 arc(31.92,18.52) 30.95,14.92 30.9,14.2 30.87,11.39 30.87,6.04 30.86,6.04 31.16,5.76 P1.A14
UPSTREAM_RX+: length 74.8
  BOTTOM w0.25: P1.A16 33.16,5.65 arc(33.18,5.75) 33.23,5.83 33.37,5.97 arc(33.42,6.05) 33.44,6.15 33.44,9.93 arc(34.89,17.19) 39,23.35 arc(41.15,26.56) 41.9,30.35 41.9,39.25 41.55,39.6 R17.1 41.55,43.3 41.84,43.58 41.84,51.81 arc(40.3,55.51) 36.6,57.05 31.84,57.05 arc(27.49,58.85) 25.69,63.2 arc(25.67,63.29) 25.61,63.38 25.47,63.51 arc(25.42,63.59) 25.4,63.69 J1.A16
UPSTREAM_RX-: length 74.7
  BOTTOM w0.25: P1.A17 34.16,5.65 arc(34.14,5.75) 34.08,5.83 33.95,5.97 arc(33.89,6.05) 33.87,6.15 33.87,9.93 arc(35.28,17.03) 39.3,23.04 arc(41.54,26.39) 42.33,30.35 42.33,39.78 42.4,39.85 42.4,41.05 42.33,41.12 42.33,41.53 R18.1 42.45,43.4 42.27,43.58 42.27,51.81 arc(40.61,55.82) 36.6,57.48 31.84,57.48 arc(27.79,59.15) 26.12,63.2 arc(26.13,63.29) 26.19,63.38 26.33,63.51 arc(26.38,63.59) 26.4,63.69 J1.A17
UPSTREAM_TX+: length 64.3
  TOP w0.25: 31.1,26.65 31.1,26.5 30.95,26.35 ; 31.1,26.65 31.1,29.86 31.2,29.96 31.2,49.97 arc(30.47,53.64) 28.4,56.74 24.56,60.57 arc(23.91,61.55) 23.68,62.7 23.68,63.31 23.61,63.38 23.61,63.56 23.47,63.7 arc(23.42,63.78) 23.4,63.87 J1.B14 ; 31.1,26.65 30.95,26.5 30.95,26.35 ; 30.95,26.35 R22.1 30.95,24.94 31.44,24.45 31.44,6.04 31.16,5.76 P1.B14
UPSTREAM_TX-: length 63.8
  TOP w0.25: P1.B15 32.16,5.76 31.87,6.04 31.87,24.45 31.95,24.53 R23.1 31.95,28.7 31.6,29.05 31.6,29.75 31.63,29.78 31.63,49.97 arc(30.87,53.8) 28.7,57.05 24.87,60.88 arc(24.31,61.72) 24.11,62.7 24.11,63.31 24.19,63.38 24.19,63.56 24.33,63.7 arc(24.38,63.78) 24.4,63.87 J1.B15
N7272816: length 3
  TOP w0.15: v1(50.4,38.55) 49.8,39.15 R19.1
  BOTTOM w0.15: U2.15 50.45,38.6 v1(50.4,38.55)
N7273068: length 7.5
  TOP w0.15: D4.1 53.5,42.85 v1(53.8,42.55)
  BOTTOM w0.15: U2.8 52.35,42.7 53.25,43.6 R20.2 55.4,43.55 54.4,42.55 v1(53.8,42.55)
N7273578: length 2
  BOTTOM w0.15: U2.7 50.95,43.2 51.2,43.45 51.65,43.45 51.8,43.6 51.8,43.9 C58.2
N7273582: length 1.5
  BOTTOM w0.15: C58.1 50.45,43.65 U2.6
N7274684: length 2.9
  BOTTOM w0.15: C59.1 R21.1 49.65,43.55 49.95,43.25 U2.5
N7275493: length 4.3
  TOP w0.15: R25.2 18.5,29.2 18.58,29.12 D5.1 20.33,28.3 U4.8
N7275497: length 2.9
  TOP w0.15: C70.1 R26.1 23.55,29.15 23.25,28.85 U4.5
N7275851: length 2.8
  TOP w0.15: U4.15 22.75,24.5 23.1,24.15 v1(23.5,24.15)
  BOTTOM w0.15: R24.1 23.95,23.7 v1(23.5,24.15)
N7276115: length 1.5
  TOP w0.15: C69.1 22.35,29.2 22.75,28.8 U4.6
N7276119: length 2.2
  TOP w0.15: C69.2 21.25,29.1 21.4,28.95 22.1,28.95 22.25,28.8 U4.7
N7302225: length 8.3
  TOP w0.2: P1.B11 26.16,10.4 27.5,11.75 R1.2
N7364343: length 2.9
  BOTTOM w0.15: C78.1 R27.1 24.25,45.95 23.95,46.25 U6.5
N7364351: length 7.1
  TOP w0.15: v1(20,46.95) 19.23,46.17 D6.1
  BOTTOM w0.15: v1(20,46.95) 20,45.97 ; 20,45.97 19.6,45.97 19.52,45.9 R29.2 ; 20,45.97 21.23,45.97 22.05,46.8 U6.8
N7364721: length 2.1
  TOP w0.15: R28.1 24.25,51.05 23.6,51.05 v1(23.5,50.95)
  BOTTOM w0.15: v1(23.5,50.95) 23.45,50.9 U6.15
N7364949: length 1.5
  BOTTOM w0.15: U6.6 23.45,45.85 C85.1
N7364957: length 2
  BOTTOM w0.15: U6.7 22.95,46.3 22.7,46.05 22.25,46.05 22.1,45.9 22.1,45.6 C85.2

## Copper pours and planes (outline as drawn; the poured copper is in the pictures)
+3.3V on TOP: 34,36.35 34,32.65 55.6,32.65 55.9,32.95 55.9,36.25 55.8,36.35
+3.3V on TOP: 21.4,6.55 19.8,8.15 19.8,26.05 19.9,26.15 21.2,26.15 21.3,26.05 21.3,24.75 21.5,24.55 23.5,24.55 23.6,24.65 23.6,26.05 23.7,26.15 25.1,26.15 25.2,26.05 25.2,22.95 24.9,22.65 24.7,22.65 25,22.35 25,10.15 25.8,9.35 25.8,6.85 25.5,6.55
+3.3V on TOP: 15.2,63.55 15.2,59.75 17.7,57.25 19.8,57.25 20.5,56.55 20.5,34.15 21.4,33.25 23.8,33.25 25,34.45 25,55.95 21.4,59.55 18.8,59.55 17.7,60.65 17.7,63.45 17.6,63.55
+3.3V on BOTTOM: 48.1,40.45 49.5,40.45 49.6,40.35 49.6,38.95 49.7,38.85 51.7,38.85 51.9,39.05 51.9,40.35 52,40.45 53.3,40.45 53.4,40.35 53.4,32.95 53.1,32.65 48.3,32.65 48,32.95 48,40.35
+3.3V on BOTTOM: 19.3,36.35 19.3,19.55 25.5,19.55 25.5,32.75 25.6,32.65 34.8,32.65 34.8,36.25 33.3,36.25 33.1,36.45 33,36.35
+3.3V on BOTTOM: 25.8,49.05 24.4,49.05 24.3,49.15 24.3,50.55 24.2,50.65 22.2,50.65 22,50.45 22,49.15 21.9,49.05 20.6,49.05 20.5,49.15 20.5,55.25 20.6,55.35 25.7,55.35 25.9,55.15 25.9,49.15
GND on GND2: 16.02,0.72 16.02,10.92 13.69,13.25 11.36,10.92 11.36,5 4.36,5 4.36,13.25 0.6,13.25 0.9,13.55 0.9,68.38 94.6,68.38 94.6,13.35 94.5,13.25 35.31,13.25 35.31,0.72 35.1,0.5 29.32,0.5 29.11,0.72 29.11,7.45 27.66,8.91 26.2,7.45 26.2,0.72 25.99,0.5 16.23,0.5
GND on GND3: 16.02,0.72 16.02,10.92 13.69,13.25 11.36,10.92 11.36,5 4.36,5 4.36,13.25 0.9,13.25 1.3,13.65 1.3,68.38 94.2,68.38 94.2,13.35 94.1,13.25 35.31,13.25 35.31,0.72 35.1,0.5 29.32,0.5 29.11,0.72 29.11,7.45 27.66,8.91 26.2,7.45 26.2,0.72 25.99,0.5 16.23,0.5

## Text on the board
Ref Des/Silkscreen Top: PLUS | MINUS | RX | TX | PCIe INTERPOSER | REFCLK
User.6: FIGURE | FINISHED_SIZE | 0.35 | 1.5 | 1.6 | DRILL CHART: TOP to BOTTOM | ALL UNITS ARE IN MILLIMETERS | PLATED | QTY | 130 | 6 | 24 | 160 | TOTAL HOLES:
